# Altium PCB ANTS-MotorBoard.PcbDoc (part 2 of 3)
Units mm, origin at the board's own origin, x right, y up, seen from the top; angles counter-clockwise.
Board outline 50 x 50 mm, 2 copper layers (Top Layer, Bottom Layer); 2 components, 10 nets, 26 pads, 0 vias.
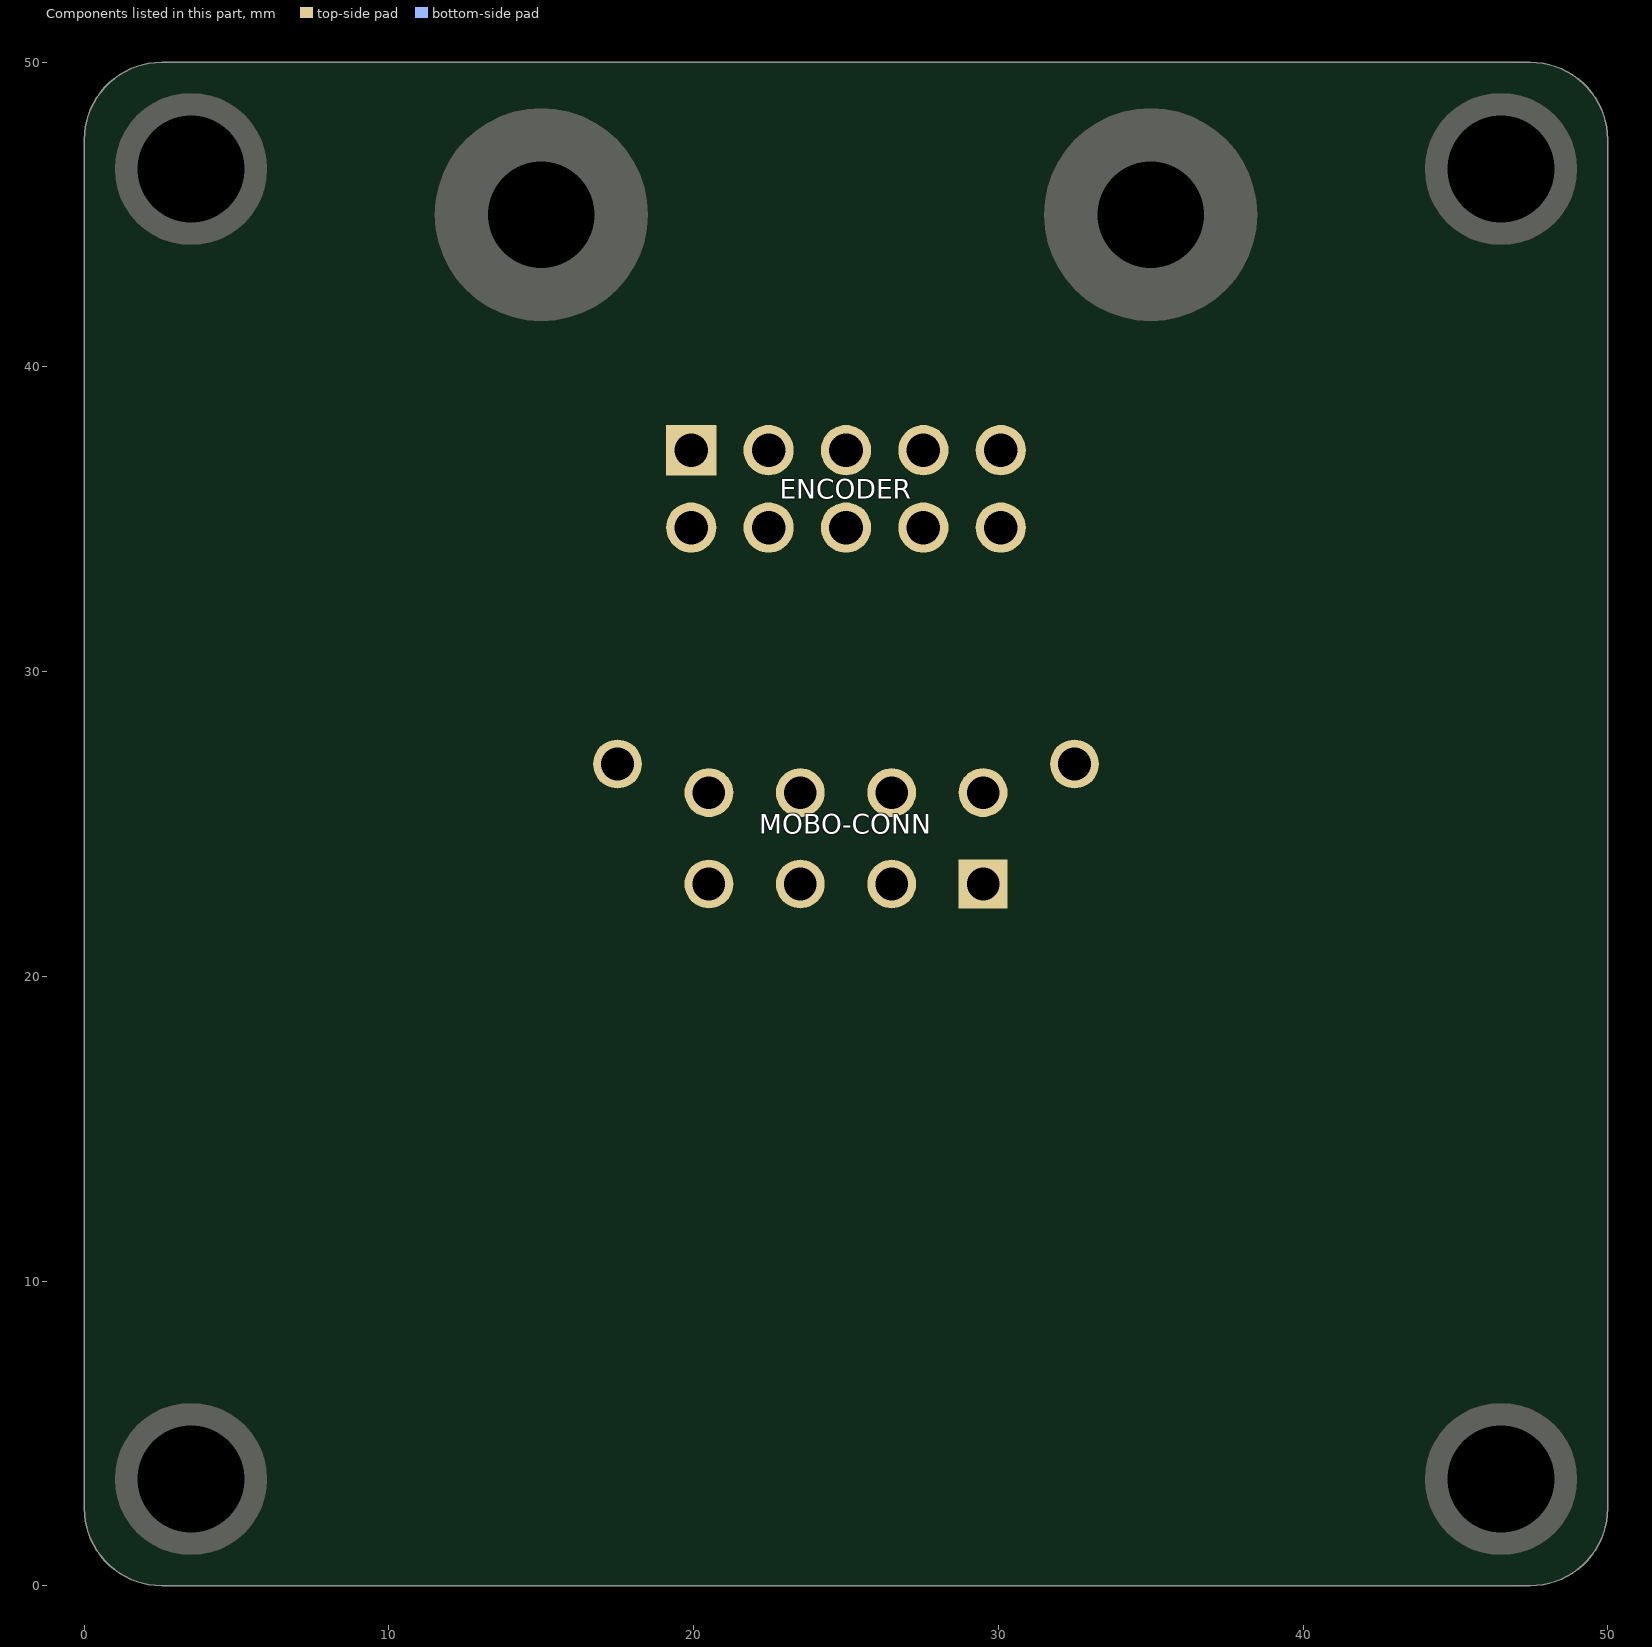
[diagram p2: the components of this part, seen from the top]

## Nets (pads, with @x,y where several pads share a name; then routed paths per layer and width w, separated by ;. In a path a pad name is that pad's centre, name@x,y a point inside that pad or via, vN(x,y) a via of type N, cw(c..) or ccw(c..) an arc to the next point about the centre after c; other vN are vias at no path point) (continued)
copper on no net: (continued)
  Top Layer w0.025: 15.7,2.159 16.005,2.159 ; 15.7,2.184 16.005,2.184 ; 15.7,2.21 15.98,2.21 ; 15.7,2.235 15.98,2.235 ; 15.7,2.261 15.954,2.261 ; 15.7,2.286 15.954,2.286 ; 15.7,2.311 15.954,2.311 ; 15.7,2.337 15.929,2.337 ; 15.7,2.362 15.929,2.362 ; 15.7,2.388 15.929,2.388 ; 15.7,2.413 15.929,2.413 ; 15.7,2.438 15.929,2.438 ; 15.7,2.464 15.929,2.464 ; 15.7,2.489 15.929,2.489 ; 15.7,2.515 15.929,2.515 ; 15.7,2.54 15.929,2.54 ; 15.7,2.565 15.929,2.565 ; 15.7,2.591 15.929,2.591 ; 15.7,2.616 15.954,2.616 ; 15.7,2.642 15.954,2.642 ; 15.7,2.667 15.954,2.667 ; 15.7,2.692 15.98,2.692 ; 15.7,2.718 15.98,2.718 ; 15.7,2.743 16.005,2.743 ; 15.726,2.108 16.081,2.108 ; 15.726,2.134 16.031,2.134 ; 15.726,2.769 16.031,2.769 ; 15.726,2.794 16.056,2.794 ; 15.726,2.819 16.081,2.819 ; 15.751,2.057 16.183,2.057 ; 15.751,2.083 16.107,2.083 ; 15.751,2.845 16.132,2.845 ; 15.777,2.032 16.589,2.032 ; 15.777,2.87 16.234,2.87 ; 15.777,2.896 17.047,2.896 ; 15.802,1.981 16.589,1.981 ; 15.802,2.007 16.589,2.007 ; 15.802,2.921 17.047,2.921 ; 15.827,1.956 16.589,1.956 ; 15.827,2.946 17.047,2.946 ; 15.853,1.93 16.589,1.93 ; 15.853,2.972 17.047,2.972 ; 15.878,2.997 17.047,2.997 ; 15.904,1.905 16.589,1.905 ; 15.904,3.023 17.047,3.023 ; 15.929,1.88 16.589,1.88 ; 15.954,3.048 17.047,3.048 ; 15.98,1.854 16.589,1.854 ; 15.98,3.073 17.047,3.073 ; 16.031,1.829 16.589,1.829 ; 16.056,3.099 17.047,3.099 ; 16.107,1.803 16.589,1.803 ; 16.132,3.124 17.047,3.124 ; 16.793,1.803 17.047,1.803 ; 16.793,1.829 17.047,1.829 ; 16.793,1.854 17.047,1.854 ; 16.793,1.88 17.047,1.88 ; 16.793,1.905 17.047,1.905 ; 16.793,1.93 17.047,1.93 ; 16.793,1.956 17.047,1.956 ; 16.793,1.981 17.047,1.981 ; 16.793,2.007 17.047,2.007 ; 16.793,2.032 17.047,2.032 ; 16.793,2.057 17.047,2.057 ; 16.793,2.083 17.047,2.083 ; 16.793,2.108 17.047,2.108 ; 16.793,2.134 17.047,2.134 ; 16.793,2.159 17.047,2.159 ; 16.793,2.184 17.047,2.184 ; 16.793,2.21 17.047,2.21 ; 16.793,2.235 17.047,2.235 ; 16.793,2.261 17.047,2.261 ; 16.793,2.286 17.047,2.286 ; 16.793,2.311 17.047,2.311 ; 16.793,2.337 17.047,2.337 ; 16.793,2.362 17.047,2.362 ; 16.793,2.388 17.047,2.388 ; 16.793,2.413 17.047,2.413 ; 16.793,2.438 17.047,2.438 ; 16.793,2.464 17.047,2.464 ; 16.793,2.489 17.047,2.489 ; 16.793,2.515 17.047,2.515 ; 16.793,2.54 17.047,2.54 ; 16.793,2.565 17.047,2.565 ; 16.793,2.591 17.047,2.591 ; 16.793,2.616 17.047,2.616 ; 16.793,2.642 17.047,2.642 ; 16.793,2.667 17.047,2.667 ; 16.793,2.692 17.047,2.692 ; 16.793,2.718 17.047,2.718 ; 16.793,2.743 17.047,2.743 ; 16.793,2.769 17.047,2.769 ; 16.793,2.794 17.047,2.794 ; 16.793,2.819 17.047,2.819 ; 16.793,2.845 17.047,2.845 ; 16.793,2.87 17.047,2.87 ; 17.224,1.803 17.504,1.803 ; 17.224,1.829 17.504,1.829 ; 17.224,1.854 17.504,1.854 ; 17.224,1.88 17.504,1.88 ; 17.224,1.905 17.504,1.905 ; 17.224,1.93 17.504,1.93 ; 17.224,1.956 17.504,1.956 ; 17.224,1.981 17.504,1.981 ; 17.224,2.007 17.504,2.007 ; 17.224,2.032 17.504,2.032 ; 17.224,2.057 17.504,2.057 ; 17.224,2.083 17.504,2.083 ; 17.224,2.108 17.504,2.108 ; 17.224,2.134 17.504,2.134 ; 17.224,2.159 17.504,2.159 ; 17.224,2.184 17.504,2.184 ; 17.224,2.21 17.504,2.21 ; 17.224,2.235 17.504,2.235 ; 17.224,2.261 17.504,2.261 ; 17.224,2.286 17.504,2.286 ; 17.224,2.311 17.504,2.311 ; 17.224,2.337 17.504,2.337 ; 17.224,2.362 17.504,2.362 ; 17.224,2.388 17.504,2.388 ; 17.224,2.413 17.504,2.413 ; 17.224,2.438 17.504,2.438 ; 17.224,2.464 17.504,2.464 ; 17.224,2.489 17.504,2.489 ; 17.224,11.405 17.275,11.405 ; 17.224,11.43 17.301,11.43 ; 17.25,2.515 17.504,2.515 ; 17.25,2.54 17.504,2.54 ; 17.25,2.565 17.504,2.565 ; 17.25,2.591 17.504,2.591 ; 17.25,2.616 17.504,2.616 ; 17.25,2.642 17.529,2.642 ; 17.25,2.667 17.529,2.667 ; 17.25,2.692 17.529,2.692 ; 17.25,11.455 17.326,11.455 ; 17.275,2.718 17.555,2.718 ; 17.275,2.743 17.58,2.743 ; 17.275,2.769 17.58,2.769 ; 17.275,11.481 17.377,11.481 ; 17.301,2.794 17.631,2.794 ; 17.301,2.819 17.656,2.819 ; 17.301,11.506 17.428,11.506 ; 17.326,2.845 17.707,2.845 ; 17.326,2.87 17.783,2.87 ; 17.326,11.532 17.453,11.532 ; 17.351,2.896 18.494,2.896 ; 17.351,2.921 18.469,2.921 ; 17.351,11.557 17.478,11.557 ; 17.377,2.946 18.469,2.946 ; 17.377,11.582 17.529,11.582 ; 17.402,2.972 18.444,2.972 ; 17.402,11.608 17.555,11.608 ; 17.428,2.997 18.418,2.997 ; 17.428,11.633 17.58,11.633 ; 17.453,11.659 17.605,11.659 ; 17.478,3.023 18.367,3.023 ; 17.478,11.684 17.631,11.684 ; 17.504,3.048 18.342,3.048 ; 17.504,11.709 17.656,11.709 ; 17.555,3.073 18.291,3.073 ; 17.555,11.735 17.707,11.735 ; 17.58,11.76 17.732,11.76 ; 17.605,3.099 18.215,3.099 ; 17.605,11.786 17.758,11.786 ; 17.631,11.811 17.783,11.811 ; 17.656,11.836 17.809,11.836 ; 17.682,11.862 17.859,11.862 ; 17.707,3.124 18.139,3.124 ; 17.707,11.887 17.885,11.887 ; 17.732,11.913 17.91,11.913 ; 17.758,11.938 17.936,11.938 ; 17.783,11.963 17.961,11.963 ; 17.809,11.989 17.986,11.989 ; 17.859,12.014 18.037,12.014 ; 17.885,12.04 18.063,12.04 ; 17.91,12.065 18.088,12.065 ; 17.936,12.09 18.113,12.09 ; 17.961,12.116 18.139,12.116 ; 17.986,12.141 18.19,12.141 ; 18.012,12.167 18.24,12.167 ; 18.037,12.192 18.266,12.192 ; 18.063,2.87 18.52,2.87 ; 18.063,12.217 18.291,12.217 ; 18.113,12.243 18.317,12.243 ; 18.139,2.845 18.52,2.845 ; 18.139,12.268 18.342,12.268 ; 18.164,12.294 18.367,12.294 ; 18.19,2.819 18.545,2.819 ; 18.19,12.319 18.418,12.319 ; 18.215,2.794 18.545,2.794 ; 18.215,12.344 18.444,12.344 ; 18.24,2.769 18.571,2.769 ; 18.24,12.37 18.469,12.37 ; 18.266,2.743 18.571,2.743 ; 18.266,12.395 18.52,12.395 ; 18.291,2.692 18.596,2.692 ; 18.291,2.718 18.571,2.718 ; 18.291,12.421 18.545,12.421 ; 18.317,2.642 18.596,2.642 ; 18.317,2.667 18.596,2.667 ; 18.317,12.446 18.571,12.446 ; 18.342,1.803 18.621,1.803 ; 18.342,1.829 18.621,1.829 ; 18.342,1.854 18.621,1.854 ; 18.342,1.88 18.621,1.88 ; 18.342,1.905 18.621,1.905 ; 18.342,1.93 18.621,1.93 ; 18.342,1.956 18.621,1.956 ; 18.342,1.981 18.621,1.981 ; 18.342,2.007 18.621,2.007 ; 18.342,2.032 18.621,2.032 ; 18.342,2.057 18.621,2.057 ; 18.342,2.083 18.621,2.083 ; 18.342,2.108 18.621,2.108 ; 18.342,2.134 18.621,2.134 ; 18.342,2.159 18.621,2.159 ; 18.342,2.184 18.621,2.184 ; 18.342,2.21 18.621,2.21 ; 18.342,2.235 18.621,2.235 ; 18.342,2.261 18.621,2.261 ; 18.342,2.286 18.621,2.286 ; 18.342,2.311 18.621,2.311 ; 18.342,2.337 18.621,2.337 ; 18.342,2.362 18.621,2.362 ; 18.342,2.388 18.621,2.388 ; 18.342,2.413 18.621,2.413 ; 18.342,2.438 18.621,2.438 ; 18.342,2.464 18.596,2.464 ; 18.342,2.489 18.596,2.489 ; 18.342,2.515 18.596,2.515 ; 18.342,2.54 18.596,2.54 ; 18.342,2.565 18.596,2.565 ; 18.342,2.591 18.596,2.591 ; 18.342,2.616 18.596,2.616 ; 18.342,12.471 18.596,12.471 ; 18.367,12.497 18.621,12.497 ; 18.393,12.522 18.647,12.522 ; 18.418,12.548 18.698,12.548 ; 18.469,12.573 18.723,12.573 ; 18.494,12.598 18.748,12.598 ; 18.52,12.624 18.774,12.624 ; 18.545,12.649 18.825,12.649 ; 18.571,12.675 18.85,12.675 ; 18.596,12.7 18.875,12.7 ; 18.647,12.725 18.901,12.725 ; 18.672,12.751 18.952,12.751 ; 18.698,12.776 18.977,12.776 ; 18.723,12.802 19.028,12.802 ; 18.748,12.827 19.053,12.827 ; 18.774,12.852 19.104,12.852 ; 18.799,2.896 20.222,2.896 ; 18.799,2.921 20.222,2.921 ; 18.799,2.946 20.222,2.946 ; 18.799,2.972 20.222,2.972 ; 18.799,2.997 20.222,2.997 ; 18.799,3.023 20.222,3.023 ; 18.799,3.048 20.222,3.048 ; 18.799,3.073 20.222,3.073 ; 18.799,3.099 20.222,3.099 ; 18.799,3.124 20.222,3.124 ; 18.799,10.719 20.704,10.719 ; 18.799,10.744 20.806,10.744 ; 18.799,10.77 20.857,10.77 ; 18.799,10.795 20.933,10.795 ; 18.799,12.878 19.129,12.878 ; 18.825,10.693 20.653,10.693 ; 18.825,10.82 21.009,10.82 ; 18.825,10.846 21.085,10.846 ; 18.825,10.871 21.161,10.871 ; 18.825,12.903 19.688,12.903 ; 18.85,10.668 20.552,10.668 ; 18.85,10.897 21.238,10.897 ; 18.85,10.922 21.314,10.922 ; 18.85,10.947 21.39,10.947 ; 18.85,10.973 21.466,10.973 ; 18.85,12.929 19.663,12.929 ; 18.875,10.643 20.501,10.643 ; 18.875,10.998 21.542,10.998 ; 18.875,11.024 21.619,11.024 ; 18.875,11.049 21.669,11.049 ; 18.875,11.074 21.746,11.074 ; 18.875,11.1 21.796,11.1 ; 18.875,12.954 19.637,12.954 ; 18.901,10.617 20.425,10.617 ; 18.901,11.125 21.898,11.125 ; 18.901,11.151 21.974,11.151 ; 18.901,11.176 22.05,11.176 ; 18.901,11.201 22.127,11.201 ; 18.901,12.979 19.587,12.979 ; 18.926,10.566 20.272,10.566 ; 18.926,10.592 20.349,10.592 ; 18.926,11.227 22.203,11.227 ; 18.926,11.252 22.254,11.252 ; 18.926,11.278 22.355,11.278 ; 18.926,11.303 22.381,11.303 ; 18.926,11.328 22.66,11.328 ; 18.926,11.354 22.685,11.354 ; 18.952,10.541 20.196,10.541 ; 18.952,11.379 22.685,11.379 ; 18.952,11.405 22.711,11.405 ; 18.952,11.43 22.711,11.43 ; 18.952,11.455 22.711,11.455 ; 18.952,11.481 22.736,11.481 ; 18.952,13.005 19.561,13.005 ; 18.977,10.516 20.145,10.516 ; 18.977,11.506 22.736,11.506 ; 18.977,11.532 22.762,11.532 ; 19.002,10.49 20.044,10.49 ; 19.002,11.557 22.762,11.557 ; 19.002,11.582 22.762,11.582 ; 19.002,11.608 22.787,11.608 ; 19.002,11.633 22.787,11.633 ; 19.002,11.659 22.787,11.659 ; 19.002,11.684 22.812,11.684 ; 19.002,11.709 22.812,11.709 ; 19.002,13.03 19.536,13.03 ; 19.028,10.439 19.917,10.439 ; 19.028,10.465 19.968,10.465 ; 19.028,11.735 22.812,11.735 ; 19.028,11.76 22.838,11.76 ; 19.028,11.786 22.838,11.786 ; 19.028,11.811 22.838,11.811 ; 19.053,10.414 19.841,10.414 ; 19.053,11.836 22.863,11.836 ; 19.053,11.862 22.889,11.862 ; 19.053,11.887 22.889,11.887 ; 19.079,10.389 19.764,10.389 ; 19.079,11.913 22.889,11.913 ; 19.079,11.938 22.889,11.938 ; 19.079,11.963 22.914,11.963 ; 19.079,11.989 22.914,11.989 ; 19.104,10.363 19.688,10.363 ; 19.104,12.014 22.939,12.014 ; 19.129,10.338 19.612,10.338 ; 19.129,12.04 22.939,12.04 ; 19.129,13.056 19.51,13.056 ; 19.155,10.312 19.536,10.312 ; 19.155,12.065 22.965,12.065 ; 19.18,10.262 19.383,10.262 ; 19.18,10.287 19.434,10.287 ; 19.206,10.236 19.307,10.236 ; 19.206,12.09 22.965,12.09 ; 19.231,12.116 22.99,12.116 ; 19.231,13.081 19.485,13.081 ; 19.256,12.878 19.714,12.878 ; 19.282,12.141 23.016,12.141 ; 19.282,12.852 19.739,12.852 ; 19.307,12.167 23.041,12.167 ; 19.307,12.827 19.79,12.827 ; 19.333,12.192 23.066,12.192 ; 19.333,12.802 19.815,12.802 ; 19.358,1.803 19.612,1.803 ; 19.358,1.829 19.612,1.829 ; 19.358,1.854 19.612,1.854 ; 19.358,1.88 19.612,1.88 ; 19.358,1.905 19.612,1.905 ; 19.358,1.93 19.612,1.93 ; 19.358,1.956 19.612,1.956 ; 19.358,1.981 19.612,1.981 ; 19.358,2.007 19.612,2.007 ; 19.358,2.032 19.612,2.032 ; 19.358,2.057 19.612,2.057 ; 19.358,2.083 19.612,2.083 ; 19.358,2.108 19.612,2.108 ; 19.358,2.134 19.612,2.134 ; 19.358,2.159 19.612,2.159 ; 19.358,2.184 19.612,2.184 ; 19.358,2.21 19.612,2.21 ; 19.358,2.235 19.612,2.235 ; 19.358,2.261 19.612,2.261 ; 19.358,2.286 19.612,2.286 ; 19.358,2.311 19.612,2.311 ; 19.358,2.337 19.612,2.337 ; 19.358,2.362 19.612,2.362 ; 19.358,2.388 19.612,2.388 ; 19.358,2.413 19.612,2.413 ; 19.358,2.438 19.612,2.438 ; 19.358,2.464 19.612,2.464 ; 19.358,2.489 19.612,2.489 ; 19.358,2.515 19.612,2.515 ; 19.358,2.54 19.612,2.54 ; 19.358,2.565 19.612,2.565 ; 19.358,2.591 19.612,2.591 ; 19.358,2.616 19.612,2.616 ; 19.358,2.642 19.612,2.642 ; 19.358,2.667 19.612,2.667 ; 19.358,2.692 19.612,2.692 ; 19.358,2.718 19.612,2.718 ; 19.358,2.743 19.612,2.743 ; 19.358,2.769 19.612,2.769 ; 19.358,2.794 19.612,2.794 ; 19.358,2.819 19.612,2.819 ; 19.358,2.845 19.612,2.845 ; 19.358,2.87 19.612,2.87 ; 19.358,12.217 23.092,12.217 ; 19.358,12.751 19.866,12.751 ; 19.358,12.776 19.841,12.776 ; 19.383,12.725 19.891,12.725 ; 19.383,13.106 19.434,13.106 ; 19.409,12.243 23.117,12.243 ; 19.409,12.7 19.942,12.7 ; 19.434,12.268 22.431,12.268 ; 19.434,12.675 19.968,12.675 ; 19.46,12.294 22.381,12.294 ; 19.46,12.649 19.993,12.649 ; 19.485,12.319 22.355,12.319 ; 19.485,12.624 20.018,12.624 ; 19.51,12.598 21.974,12.598 ; 19.536,12.344 22.33,12.344 ; 19.536,12.548 22.05,12.548 ; 19.536,12.573 22,12.573 ; 19.561,12.37 22.304,12.37 ; 19.587,12.446 22.177,12.446 ; 19.587,12.471 22.152,12.471 ; 19.587,12.522 22.076,12.522 ; 19.612,12.395 22.254,12.395 ; 19.612,12.421 22.203,12.421 ; 19.612,12.497 22.101,12.497 ; 20.069,4.775 20.12,4.775 ; 20.069,4.801 20.145,4.801 ; 20.069,4.826 20.171,4.826 ; 20.069,4.851 20.196,4.851 ; 20.095,4.877 20.222,4.877 ; 20.12,4.902 20.247,4.902 ; 20.12,4.928 20.272,4.928 ; 20.12,12.624 21.923,12.624 ; 20.145,4.953 20.298,4.953 ; 20.145,12.649 21.898,12.649 ; 20.171,4.978 20.323,4.978 ; 20.171,5.004 20.349,5.004 ; 20.196,5.029 20.374,5.029 ; 20.196,12.675 21.873,12.675 ; 20.222,5.055 20.374,5.055 ; 20.222,5.08 20.399,5.08 ; 20.247,5.105 20.425,5.105 ; 20.272,5.131 20.45,5.131 ; 20.272,5.156 20.476,5.156 ; 20.272,12.7 21.822,12.7 ; 20.298,5.182 20.501,5.182 ; 20.298,12.725 21.796,12.725 ; 20.323,5.207 20.526,5.207 ; 20.323,5.232 20.552,5.232 ; 20.349,5.258 20.577,5.258 ; 20.349,5.283 20.603,5.283 ; 20.349,12.751 21.746,12.751 ; 20.374,5.309 20.628,5.309 ; 20.399,1.803 21.39,1.803 ; 20.399,1.829 21.492,1.829 ; 20.399,1.854 21.542,1.854 ; 20.399,1.88 21.593,1.88 ; 20.399,1.905 21.619,1.905 ; 20.399,1.93 21.669,1.93 ; 20.399,1.956 21.695,1.956 ; 20.399,1.981 21.695,1.981 ; 20.399,2.007 21.72,2.007 ; 20.399,2.464 21.72,2.464 ; 20.399,2.489 21.72,2.489 ; 20.399,2.515 21.695,2.515 ; 20.399,2.54 21.669,2.54 ; 20.399,2.565 21.644,2.565 ; 20.399,2.591 21.593,2.591 ; 20.399,2.616 21.542,2.616 ; 20.399,2.642 21.492,2.642 ; 20.399,2.667 21.415,2.667 ; 20.399,2.692 21.263,2.692 ; 20.399,2.718 20.679,2.718 ; 20.399,5.334 20.653,5.334 ; 20.399,12.776 21.72,12.776 ; 20.425,2.032 21.746,2.032 ; 20.425,2.438 21.746,2.438 ; 20.425,2.743 20.679,2.743 ; 20.425,2.769 20.704,2.769 ; 20.425,2.794 20.704,2.794 ; 20.425,2.819 20.755,2.819 ; 20.425,2.845 20.806,2.845 ; 20.425,5.359 20.679,5.359 ; 20.425,5.385 20.679,5.385 ; 20.45,2.87 20.907,2.87 ; 20.45,2.896 21.771,2.896 ; 20.45,5.41 20.704,5.41 ; 20.45,5.436 20.73,5.436 ; 20.45,12.802 21.695,12.802 ; 20.476,2.921 21.771,2.921 ; 20.476,5.461 20.755,5.461 ; 20.476,5.486 20.78,5.486 ; 20.501,2.946 21.771,2.946 ; 20.501,5.512 20.806,5.512 ; 20.501,5.537 20.831,5.537 ; 20.501,12.827 21.644,12.827 ; 20.526,2.972 21.771,2.972 ; 20.526,5.563 20.857,5.563 ; 20.552,2.997 21.771,2.997 ; 20.552,5.588 20.882,5.588 ; 20.552,5.613 20.882,5.613 ; 20.552,5.639 20.882,5.639 ; 20.552,5.664 20.882,5.664 ; 20.552,5.69 20.882,5.69 ; 20.552,5.715 20.882,5.715 ; 20.552,5.74 20.907,5.74 ; 20.552,5.766 20.907,5.766 ; 20.552,5.791 20.907,5.791 ; 20.552,5.817 20.907,5.817 ; 20.552,6.274 20.933,6.274 ; 20.552,6.299 20.933,6.299 ; 20.552,6.604 20.958,6.604 ; 20.552,6.629 20.958,6.629 ; 20.552,6.655 20.958,6.655 ; 20.552,6.96 20.958,6.96 ; 20.552,6.985 20.958,6.985 ; 20.552,12.852 21.619,12.852 ; 20.577,3.023 21.771,3.023 ; 20.577,5.842 20.907,5.842 ; 20.577,5.867 20.907,5.867 ; 20.577,5.893 20.907,5.893 ; 20.577,5.918 20.907,5.918 ; 20.577,5.944 20.907,5.944 ; 20.577,5.969 20.907,5.969 ; 20.577,5.994 20.907,5.994 ; 20.577,6.02 20.907,6.02 ; 20.577,6.045 20.907,6.045 ; 20.577,6.071 20.933,6.071 ; 20.577,6.096 20.933,6.096 ; 20.577,6.121 20.933,6.121 ; 20.577,6.147 20.933,6.147 ; 20.577,6.172 20.933,6.172 ; 20.577,6.198 20.933,6.198 ; 20.577,6.223 20.933,6.223 ; 20.577,6.248 20.933,6.248 ; 20.577,6.325 20.933,6.325 ; 20.577,6.35 20.933,6.35 ; 20.577,6.375 20.933,6.375 ; 20.577,6.401 20.933,6.401 ; 20.577,6.426 20.933,6.426 ; 20.577,6.452 20.933,6.452 ; 20.577,6.477 20.958,6.477 ; 20.577,6.502 20.958,6.502 ; 20.577,6.528 20.958,6.528 ; 20.577,6.553 20.958,6.553 ; 20.577,6.579 20.958,6.579 ; 20.577,6.68 20.958,6.68 ; 20.577,6.706 20.958,6.706 ; 20.577,6.731 20.958,6.731 ; 20.577,6.756 20.958,6.756 ; 20.577,6.782 20.958,6.782 ; 20.577,6.807 20.958,6.807 ; 20.577,6.833 20.958,6.833 ; 20.577,6.858 20.958,6.858 ; 20.577,6.883 20.958,6.883 ; 20.577,6.909 20.958,6.909 ; 20.577,6.934 20.958,6.934 ; 20.577,7.01 20.958,7.01 ; 20.577,7.036 20.958,7.036 ; 20.577,7.061 20.958,7.061 ; 20.577,7.087 20.958,7.087 ; 20.577,7.112 20.958,7.112 ; 20.577,7.137 20.958,7.137 ; 20.577,7.163 20.958,7.163 ; 20.577,7.188 20.958,7.188 ; 20.577,7.214 20.958,7.214 ; 20.577,7.239 20.958,7.239 ; 20.577,7.264 20.958,7.264 ; 20.577,7.29 20.958,7.29 ; 20.577,7.315 20.958,7.315 ; 20.577,7.341 20.958,7.341 ; 20.577,7.366 20.984,7.366 ; 20.577,7.391 20.984,7.391 ; 20.577,7.417 20.984,7.417 ; 20.577,7.442 20.984,7.442 ; 20.577,7.468 20.984,7.468 ; 20.577,7.493 20.984,7.493 ; 20.577,7.518 20.984,7.518 ; 20.577,7.544 20.984,7.544 ; 20.577,7.569 20.984,7.569 ; 20.577,7.595 20.984,7.595 ; 20.577,7.62 20.984,7.62 ; 20.577,7.645 20.984,7.645 ; 20.577,7.671 20.984,7.671 ; 20.577,7.696 20.984,7.696 ; 20.577,7.722 20.984,7.722 ; 20.577,7.747 20.984,7.747 ; 20.577,7.772 21.009,7.772 ; 20.577,7.798 21.009,7.798 ; 20.577,7.823 21.009,7.823 ; 20.577,7.849 21.009,7.849 ; 20.577,7.874 21.009,7.874 ; 20.577,7.899 21.009,7.899 ; 20.577,7.925 21.009,7.925 ; 20.577,7.95 21.009,7.95 ; 20.577,7.976 21.009,7.976 ; 20.577,8.001 21.009,8.001 ; 20.577,8.026 21.009,8.026 ; 20.577,8.052 21.009,8.052 ; 20.577,8.077 21.009,8.077 ; 20.577,8.103 21.009,8.103 ; 20.577,8.128 21.009,8.128 ; 20.577,8.153 21.009,8.153 ; 20.577,8.179 21.009,8.179 ; 20.577,8.204 21.009,8.204 ; 20.577,8.23 21.009,8.23 ; 20.577,8.255 21.009,8.255 ; 20.577,8.28 21.009,8.28 ; 20.577,8.306 21.009,8.306 ; 20.577,8.331 21.009,8.331 ; 20.577,8.357 21.009,8.357 ; 20.577,8.382 21.009,8.382 ; 20.577,8.407 21.009,8.407 ; 20.577,8.433 21.009,8.433 ; 20.577,8.458 21.009,8.458 ; 20.577,8.484 21.009,8.484 ; 20.577,8.509 21.009,8.509 ; 20.577,8.534 21.034,8.534 ; 20.577,8.56 21.034,8.56 ; 20.577,8.585 21.034,8.585 ; 20.577,8.611 21.034,8.611 ; 20.577,8.636 21.034,8.636 ; 20.577,8.661 21.034,8.661 ; 20.577,8.687 21.034,8.687 ; 20.577,8.712 21.034,8.712 ; 20.577,8.738 21.06,8.738 ; 20.577,8.763 21.06,8.763 ; 20.577,8.788 21.085,8.788 ; 20.577,12.878 21.568,12.878 ; 20.603,8.814 21.136,8.814 ; 20.603,8.839 21.187,8.839 ; 20.628,3.048 21.771,3.048 ; 20.628,12.903 21.542,12.903 ; 20.653,8.865 21.212,8.865 ; 20.679,3.073 21.771,3.073 ; 20.679,8.89 21.263,8.89 ; 20.679,12.929 21.517,12.929 ; 20.704,8.915 21.314,8.915 ; 20.73,3.099 21.771,3.099 ; 20.73,8.941 21.339,8.941 ; 20.73,12.954 21.466,12.954 ; 20.755,8.966 21.39,8.966 ; 20.78,8.992 21.415,8.992 ; 20.78,12.979 21.441,12.979 ; 20.806,9.017 21.466,9.017 ; 20.831,3.124 21.771,3.124 ; 20.831,9.042 21.492,9.042 ; 20.831,13.005 21.39,13.005 ; 20.882,9.068 21.542,9.068 ; 20.882,9.093 21.593,9.093 ; 20.882,13.03 21.365,13.03 ; 20.907,13.056 21.339,13.056 ; 20.933,9.119 21.644,9.119 ; 20.958,9.144 21.669,9.144 ; 20.984,9.169 21.72,9.169 ; 20.984,13.081 21.288,13.081 ; 21.009,9.195 21.771,9.195 ; 21.009,13.106 21.263,13.106 ; 21.034,9.22 21.796,9.22 ; 21.085,9.246 21.847,9.246 ; 21.085,13.132 21.238,13.132 ; 21.111,9.271 21.873,9.271 ; 21.136,9.296 21.923,9.296 ; 21.161,9.322 21.949,9.322 ; 21.187,9.347 22,9.347 ; 21.212,9.373 22.05,9.373 ; 21.238,9.398 22.076,9.398 ; 21.263,9.423 22.127,9.423 ; 21.288,9.449 22.152,9.449 ; 21.314,9.474 22.203,9.474 ; 21.339,2.057 21.746,2.057 ; 21.339,2.413 21.746,2.413 ; 21.339,9.5 22.254,9.5 ; 21.39,9.525 22.304,9.525 ; 21.415,2.083 21.771,2.083 ; 21.415,2.388 21.771,2.388 ; 21.415,9.55 22.33,9.55 ; 21.441,9.576 22.381,9.576 ; 21.466,2.108 21.771,2.108 ; 21.466,2.362 21.771,2.362 ; 21.466,9.601 22.431,9.601 ; 21.492,2.134 21.771,2.134 ; 21.492,2.337 21.771,2.337 ; 21.492,9.627 22.457,9.627 ; 21.517,2.159 21.771,2.159 ; 21.517,2.184 21.771,2.184 ; 21.517,2.21 21.771,2.21 ; 21.517,2.235 21.771,2.235 ; 21.517,2.261 21.771,2.261 ; 21.517,2.286 21.771,2.286 ; 21.517,2.311 21.771,2.311 ; 21.517,9.652 22.508,9.652 ; 21.542,9.677 22.533,9.677 ; 21.568,9.703 22.584,9.703 ; 21.619,9.728 22.609,9.728 ; 21.644,9.754 22.66,9.754 ; 21.669,9.779 22.685,9.779 ; 21.695,9.804 22.736,9.804 ; 21.72,9.83 22.787,9.83 ; 21.746,9.855 22.812,9.855 ; 21.771,9.881 22.863,9.881 ; 21.796,9.906 22.914,9.906 ; 21.822,9.931 22.939,9.931 ; 21.847,9.957 22.99,9.957 ; 21.873,9.982 23.016,9.982 ; 21.898,10.008 23.066,10.008 ; 21.949,10.033 23.117,10.033 ; 21.974,10.058 23.143,10.058 ; 22,10.084 23.193,10.084 ; 22.025,10.109 23.244,10.109 ; 22.05,10.135 23.27,10.135 ; 22.076,10.16 23.27,10.16 ; 22.101,10.185 23.27,10.185 ; 22.127,10.211 23.295,10.211 ; 22.177,10.236 23.295,10.236 ; 22.203,10.262 23.295,10.262 ; 22.228,10.287 23.295,10.287 ; 22.254,10.312 23.295,10.312 ; 22.279,10.338 23.295,10.338 ; 22.33,10.363 23.295,10.363 ; 22.33,10.389 23.295,10.389 ; 22.381,10.414 23.295,10.414 ; 22.406,10.439 23.295,10.439 ; 22.431,10.465 23.295,10.465 ; 22.431,11.303 22.66,11.303 ; 22.457,10.49 23.295,10.49 ; 22.457,10.998 22.558,10.998 ; 22.457,11.024 22.558,11.024 ; 22.457,11.049 22.558,11.049 ; 22.457,11.074 22.584,11.074 ; 22.457,11.1 22.584,11.1 ; 22.457,11.125 22.609,11.125 ; 22.457,11.151 22.609,11.151 ; 22.457,11.176 22.609,11.176 ; 22.457,11.201 22.635,11.201 ; 22.457,11.227 22.635,11.227 ; 22.457,11.252 22.635,11.252 ; 22.457,11.278 22.66,11.278 ; 22.482,10.516 23.295,10.516 ; 22.482,10.947 22.533,10.947 ; 22.482,10.973 22.533,10.973 ; 22.508,10.541 23.32,10.541 ; 22.508,10.566 23.32,10.566 ; 22.508,10.592 23.32,10.592 ; 22.533,10.617 23.32,10.617 ; 22.533,10.643 23.32,10.643 ; 22.533,10.668 23.32,10.668 ; 22.533,12.268 23.143,12.268 ; 22.558,10.693 23.32,10.693 ; 22.584,10.719 23.32,10.719 ; 22.584,10.744 23.32,10.744 ; 22.584,10.77 23.32,10.77 ; 22.584,10.795 23.32,10.795 ; 22.584,10.82 23.32,10.82 ; 22.609,10.846 23.32,10.846 ; 22.609,10.871 23.32,10.871 ; 22.635,10.897 23.32,10.897 ; 22.635,12.294 23.168,12.294 ; 22.66,10.922 23.32,10.922 ; 22.66,10.947 23.346,10.947 ; 22.66,10.973 23.346,10.973 ; 22.66,10.998 23.346,10.998 ; 22.685,11.024 23.346,11.024 ; 22.685,11.049 23.346,11.049 ; 22.685,11.074 23.346,11.074 ; 22.711,11.1 23.346,11.1 ; 22.711,11.125 23.346,11.125 ; 22.736,11.151 23.371,11.151 ; 22.736,11.176 23.371,11.176 ; 22.736,11.201 23.371,11.201 ; 22.736,11.227 23.371,11.227 ; 22.762,11.252 23.371,11.252 ; 22.762,11.278 23.371,11.278 ; 22.787,11.303 23.371,11.303 ; 22.787,11.328 23.371,11.328 ; 22.812,11.354 23.371,11.354 ; 22.812,11.379 23.371,11.379 ; 22.812,11.405 23.397,11.405 ; 22.838,11.43 23.397,11.43 ; 22.838,11.455 23.397,11.455 ; 22.838,11.481 23.397,11.481 ; 22.838,12.319 23.193,12.319 ; 22.863,11.506 23.397,11.506 ; 22.863,11.532 23.397,11.532 ; 22.863,11.557 23.397,11.557 ; 22.889,11.582 23.397,11.582 ; 22.889,11.608 23.397,11.608 ; 22.914,11.633 23.397,11.633 ; 22.914,11.659 23.397,11.659 ; 22.914,11.684 23.397,11.684 ; 22.939,3.912 22.99,3.912 ; 22.939,3.937 22.99,3.937 ; 22.939,3.962 23.016,3.962 ; 22.939,3.988 23.016,3.988 ; 22.939,4.013 23.016,4.013 ; 22.939,4.039 23.041,4.039 ; 22.939,11.709 23.397,11.709 ; 22.939,11.735 23.397,11.735 ; 22.965,4.064 23.066,4.064 ; 22.965,4.089 23.066,4.089 ; 22.965,4.115 23.092,4.115 ; 22.965,4.14 23.092,4.14 ; 22.965,4.166 23.117,4.166 ; 22.965,11.76 23.397,11.76 ; 22.965,11.786 23.397,11.786 ; 22.965,11.811 23.397,11.811 ; 22.99,4.191 23.117,4.191 ; 22.99,4.216 23.117,4.216 ; 22.99,11.836 23.397,11.836 ; 22.99,11.862 23.422,11.862 ; 22.99,11.887 23.422,11.887 ; 22.99,12.344 23.193,12.344 ; 23.016,4.242 23.143,4.242 ; 23.016,4.267 23.143,4.267 ; 23.016,4.293 23.168,4.293 ; 23.016,4.318 23.168,4.318 ; 23.016,4.343 23.193,4.343 ; 23.016,11.913 23.422,11.913 ; 23.016,11.938 23.422,11.938 ; 23.016,11.963 23.422,11.963 ; 23.041,4.369 23.193,4.369 ; 23.041,4.394 23.219,4.394 ; 23.041,4.42 23.219,4.42 ; 23.041,4.445 23.244,4.445 ; 23.041,4.47 23.244,4.47 ; 23.041,6.833 23.447,6.833 ; 23.041,6.858 23.473,6.858 ; 23.041,6.883 23.473,6.883 ; 23.041,6.909 23.473,6.909 ; 23.041,6.934 23.473,6.934 ; 23.041,6.96 23.473,6.96 ; 23.041,6.985 23.473,6.985 ; 23.041,7.01 23.473,7.01 ; 23.041,7.036 23.473,7.036 ; 23.041,7.061 23.473,7.061 ; 23.041,7.087 23.473,7.087 ; 23.041,7.112 23.473,7.112 ; 23.041,7.137 23.473,7.137 ; 23.041,7.163 23.473,7.163 ; 23.041,7.188 23.473,7.188 ; 23.041,7.214 23.473,7.214 ; 23.041,7.239 23.473,7.239 ; 23.041,7.264 23.473,7.264 ; 23.041,7.29 23.473,7.29 ; 23.041,7.315 23.498,7.315 ; 23.041,7.341 23.498,7.341 ; 23.041,7.366 23.498,7.366 ; 23.041,7.391 23.498,7.391 ; 23.041,7.417 23.498,7.417 ; 23.041,7.442 23.498,7.442 ; 23.041,7.468 23.498,7.468 ; 23.041,7.493 23.498,7.493 ; 23.041,7.518 23.498,7.518 ; 23.041,7.544 23.498,7.544 ; 23.041,7.569 23.498,7.569 ; 23.041,7.595 23.498,7.595 ; 23.041,7.62 23.498,7.62 ; 23.041,7.645 23.498,7.645 ; 23.041,7.671 23.498,7.671 ; 23.041,7.696 23.498,7.696 ; 23.041,7.722 23.498,7.722 ; 23.041,7.747 23.498,7.747 ; 23.041,7.772 23.498,7.772 ; 23.041,7.798 23.498,7.798 ; 23.041,7.823 23.498,7.823 ; 23.041,7.849 23.498,7.849 ; 23.041,7.874 23.524,7.874 ; 23.041,7.899 23.524,7.899 ; 23.041,7.925 23.524,7.925 ; 23.041,7.95 23.524,7.95 ; 23.041,7.976 23.498,7.976 ; 23.041,8.001 23.498,8.001 ; 23.041,8.026 23.498,8.026 ; 23.041,8.052 23.524,8.052 ; 23.041,8.077 23.524,8.077 ; 23.041,8.103 23.524,8.103 ; 23.041,8.128 23.524,8.128 ; 23.041,8.153 23.524,8.153 ; 23.041,8.179 23.524,8.179 ; 23.041,8.204 23.524,8.204 ; 23.041,8.23 23.498,8.23 ; 23.041,8.255 23.498,8.255 ; 23.041,8.28 23.524,8.28 ; 23.041,8.306 23.524,8.306 ; 23.041,8.331 23.524,8.331 ; 23.041,8.357 23.549,8.357 ; 23.041,8.382 23.549,8.382 ; 23.041,8.407 23.549,8.407 ; 23.041,8.433 23.574,8.433 ; 23.041,11.989 23.422,11.989 ; 23.041,12.014 23.422,12.014 ; 23.066,4.496 23.27,4.496 ; 23.066,4.521 23.27,4.521 ; 23.066,4.547 23.295,4.547 ; 23.066,5.486 23.422,5.486 ; 23.066,5.512 23.422,5.512 ; 23.066,5.537 23.422,5.537 ; 23.066,5.563 23.422,5.563 ; 23.066,5.588 23.422,5.588 ; 23.066,5.613 23.422,5.613 ; 23.066,5.639 23.422,5.639 ; 23.066,5.664 23.422,5.664 ; 23.066,5.69 23.422,5.69 ; 23.066,5.715 23.422,5.715 ; 23.066,5.74 23.422,5.74 ; 23.066,5.766 23.422,5.766 ; 23.066,5.791 23.422,5.791 ; 23.066,5.817 23.422,5.817 ; 23.066,5.842 23.422,5.842 ; 23.066,5.867 23.422,5.867 ; 23.066,5.918 23.447,5.918 ; 23.066,5.944 23.447,5.944 ; 23.066,5.969 23.447,5.969 ; 23.066,5.994 23.447,5.994 ; 23.066,6.02 23.447,6.02 ; 23.066,6.045 23.447,6.045 ; 23.066,6.071 23.447,6.071 ; 23.066,6.096 23.447,6.096 ; 23.066,6.121 23.447,6.121 ; 23.066,6.147 23.447,6.147 ; 23.066,6.172 23.447,6.172 ; 23.066,6.198 23.447,6.198 ; 23.066,6.223 23.447,6.223 ; 23.066,6.248 23.447,6.248 ; 23.066,6.274 23.447,6.274 ; 23.066,6.299 23.447,6.299 ; 23.066,6.325 23.447,6.325 ; 23.066,6.35 23.447,6.35 ; 23.066,6.375 23.447,6.375 ; 23.066,6.401 23.447,6.401 ; 23.066,6.426 23.447,6.426 ; 23.066,6.452 23.447,6.452 ; 23.066,6.477 23.447,6.477 ; 23.066,6.502 23.447,6.502 ; 23.066,6.528 23.447,6.528 ; 23.066,6.553 23.473,6.553 ; 23.066,6.579 23.473,6.579 ; 23.066,6.604 23.447,6.604 ; 23.066,6.629 23.447,6.629 ; 23.066,6.655 23.447,6.655 ; 23.066,6.68 23.447,6.68 ; 23.066,6.706 23.447,6.706 ; 23.066,6.731 23.447,6.731 ; 23.066,6.756 23.447,6.756 ; 23.066,6.782 23.447,6.782 ; 23.066,6.807 23.447,6.807 ; 23.066,8.458 23.574,8.458 ; 23.066,8.484 23.574,8.484 ; 23.066,12.04 23.422,12.04 ; 23.092,4.572 23.32,4.572 ; 23.092,4.597 23.32,4.597 ; 23.092,4.623 23.346,4.623 ; 23.092,4.648 23.346,4.648 ; 23.092,5.385 23.397,5.385 ; 23.092,5.41 23.397,5.41 ; 23.092,5.436 23.397,5.436 ; 23.092,5.461 23.422,5.461 ; 23.092,5.893 23.447,5.893 ; 23.092,8.509 23.6,8.509 ; 23.092,8.534 23.625,8.534 ; 23.092,8.56 23.625,8.56 ; 23.092,12.065 23.422,12.065 ; 23.117,4.674 23.371,4.674 ; 23.117,4.699 23.371,4.699 ; 23.117,4.724 23.397,4.724 ; 23.117,4.75 23.397,4.75 ; 23.117,4.775 23.397,4.775 ; 23.117,4.801 23.397,4.801 ; 23.117,4.826 23.397,4.826 ; 23.117,4.851 23.397,4.851 ; 23.117,4.877 23.397,4.877 ; 23.117,4.902 23.397,4.902 ; 23.117,4.928 23.397,4.928 ; 23.117,4.953 23.397,4.953 ; 23.117,4.978 23.397,4.978 ; 23.117,5.004 23.397,5.004 ; 23.117,5.029 23.397,5.029 ; 23.117,5.055 23.397,5.055 ; 23.117,5.08 23.397,5.08 ; 23.117,5.105 23.397,5.105 ; 23.117,5.131 23.397,5.131 ; 23.117,5.156 23.397,5.156 ; 23.117,5.182 23.397,5.182 ; 23.117,5.207 23.397,5.207 ; 23.117,5.232 23.397,5.232 ; 23.117,5.258 23.397,5.258 ; 23.117,5.283 23.397,5.283 ; 23.117,5.309 23.397,5.309 ; 23.117,5.334 23.397,5.334 ; 23.117,5.359 23.397,5.359 ; 23.117,8.585 23.625,8.585 ; 23.117,8.611 23.625,8.611 ; 23.117,8.636 23.651,8.636 ; 23.117,12.09 23.422,12.09 ; 23.143,2.235 24.463,2.235 ; 23.143,2.261 24.438,2.261 ; 23.143,2.286 24.413,2.286 ; 23.143,2.311 24.413,2.311 ; 23.143,2.337 24.362,2.337 ; 23.143,2.362 24.362,2.362 ; 23.143,2.388 24.387,2.388 ; 23.143,2.413 24.413,2.413 ; 23.143,2.438 24.438,2.438 ; 23.143,2.464 24.463,2.464 ; 23.143,2.896 24.463,2.896 ; 23.143,2.921 24.438,2.921 ; 23.143,2.946 24.438,2.946 ; 23.143,2.972 24.413,2.972 ; 23.143,2.997 24.387,2.997 ; 23.143,3.023 24.336,3.023 ; 23.143,3.048 24.311,3.048 ; 23.143,3.073 24.26,3.073 ; 23.143,3.099 24.184,3.099 ; 23.143,3.124 24.082,3.124 ; 23.143,8.661 23.651,8.661 ; 23.143,8.687 23.651,8.687 ; 23.143,12.116 23.422,12.116 ; 23.168,8.712 23.676,8.712 ; 23.168,8.738 23.676,8.738 ; 23.168,8.763 23.701,8.763 ; 23.168,8.788 23.701,8.788 ; 23.168,12.141 23.447,12.141 ; 23.193,8.814 23.701,8.814 ; 23.193,8.839 23.701,8.839 ; 23.193,12.167 23.447,12.167 ; 23.219,8.865 23.727,8.865 ; 23.219,8.89 23.727,8.89 ; 23.219,8.915 23.727,8.915 ; 23.219,8.941 23.752,8.941 ; 23.219,8.966 23.752,8.966 ; 23.219,12.192 23.447,12.192 ; 23.244,8.992 23.778,8.992 ; 23.244,12.217 23.447,12.217 ; 23.27,9.017 23.778,9.017 ; 23.27,9.042 23.803,9.042 ; 23.27,9.068 23.803,9.068 ; 23.27,9.093 23.803,9.093 ; 23.27,9.119 23.828,9.119 ; 23.295,9.144 23.828,9.144 ; 23.295,9.169 23.828,9.169 ; 23.295,12.243 23.447,12.243 ; 23.295,12.268 23.447,12.268 ; 23.32,9.195 23.854,9.195 ; 23.32,9.22 23.854,9.22 ; 23.32,9.246 23.854,9.246 ; 23.32,9.271 23.879,9.271 ; 23.346,9.296 23.879,9.296 ; 23.346,9.322 23.905,9.322 ; 23.346,12.294 23.447,12.294 ; 23.346,12.319 23.447,12.319 ; 23.371,9.347 23.905,9.347 ; 23.371,9.373 23.905,9.373 ; 23.371,12.344 23.447,12.344 ; 23.397,9.398 23.93,9.398 ; 23.397,9.423 23.93,9.423 ; 23.397,9.449 23.93,9.449 ; 23.397,9.474 23.955,9.474 ; 23.422,9.5 23.955,9.5 ; 23.422,9.525 23.981,9.525 ; 23.422,10.109 23.498,10.109 ; 23.422,10.135 23.498,10.135 ; 23.422,10.16 23.524,10.16 ; 23.422,10.185 23.524,10.185 ; 23.422,10.211 23.524,10.211 ; 23.422,10.236 23.549,10.236 ; 23.422,10.262 23.549,10.262 ; 23.422,10.287 23.574,10.287 ; 23.422,10.312 23.574,10.312 ; 23.422,10.338 23.574,10.338 ; 23.422,10.363 23.574,10.363 ; 23.422,10.389 23.574,10.389 ; 23.422,10.414 23.6,10.414 ; 23.422,10.439 23.6,10.439 ; 23.447,9.55 23.981,9.55 ; 23.447,9.576 23.981,9.576 ; 23.447,9.601 23.981,9.601 ; 23.447,9.627 24.006,9.627 ; 23.447,9.652 24.006,9.652 ; 23.447,10.465 23.625,10.465 ; 23.447,10.49 23.625,10.49 ; 23.447,10.516 23.625,10.516 ; 23.447,10.541 23.651,10.541 ; 23.447,10.566 23.651,10.566 ; 23.447,10.592 23.651,10.592 ; 23.447,10.617 23.676,10.617 ; 23.447,10.643 23.676,10.643 ; 23.447,10.668 23.676,10.668 ; 23.447,10.693 23.701,10.693 ; 23.447,10.719 23.701,10.719 ; 23.447,10.744 23.701,10.744 ; 23.447,10.77 23.701,10.77 ; 23.447,10.795 23.727,10.795 ; 23.447,10.82 23.727,10.82 ; 23.447,10.846 23.752,10.846 ; 23.473,9.677 24.032,9.677 ; 23.473,9.703 24.032,9.703 ; 23.473,10.871 23.752,10.871 ; 23.473,10.897 23.752,10.897 ; 23.473,10.922 23.778,10.922 ; 23.473,10.947 23.778,10.947 ; 23.473,10.973 23.778,10.973 ; 23.473,10.998 23.803,10.998 ; 23.473,11.024 23.803,11.024 ; 23.498,9.728 24.032,9.728 ; 23.498,9.754 24.057,9.754 ; 23.498,11.049 23.803,11.049 ; 23.498,11.074 23.828,11.074 ; 23.498,11.1 23.828,11.1 ; 23.498,11.125 23.828,11.125 ; 23.498,11.151 23.854,11.151 ; 23.498,11.176 23.854,11.176 ; 23.498,11.201 23.854,11.201 ; 23.498,11.227 23.879,11.227 ; 23.498,11.252 23.879,11.252 ; 23.498,11.278 23.879,11.278 ; 23.498,11.303 23.879,11.303 ; 23.498,11.328 23.905,11.328 ; 23.498,11.354 23.905,11.354 ; 23.498,11.379 23.93,11.379 ; 23.498,11.405 23.93,11.405 ; 23.498,11.43 23.93,11.43 ; 23.498,11.455 23.955,11.455 ; 23.498,11.481 23.955,11.481 ; 23.498,11.506 23.955,11.506 ; 23.498,11.532 23.981,11.532 ; 23.498,11.557 23.981,11.557 ; 23.498,11.582 23.981,11.582 ; 23.498,11.608 24.006,11.608 ; 23.524,9.779 24.057,9.779 ; 23.524,9.804 24.057,9.804 ; 23.524,9.83 24.057,9.83 ; 23.524,9.855 24.082,9.855 ; 23.524,9.881 24.108,9.881 ; 23.524,11.633 24.006,11.633 ; 23.524,11.659 24.006,11.659 ; 23.524,11.684 24.006,11.684 ; 23.524,11.709 24.032,11.709 ; 23.524,11.735 24.032,11.735 ; 23.524,11.76 24.057,11.76 ; 23.524,11.786 24.057,11.786 ; 23.524,11.811 24.057,11.811 ; 23.549,9.906 24.108,9.906 ; 23.549,9.931 24.108,9.931 ; 23.549,11.836 24.057,11.836 ; 23.549,11.862 24.082,11.862 ; 23.549,11.887 24.082,11.887 ; 23.549,11.913 24.108,11.913 ; 23.549,11.938 24.108,11.938 ; 23.549,11.963 24.133,11.963 ; 23.549,11.989 24.133,11.989 ; 23.549,12.014 24.133,12.014 ; 23.549,12.04 24.184,12.04 ; 23.549,12.065 24.209,12.065 ; 23.549,12.09 24.235,12.09 ; 23.549,12.116 24.26,12.116 ; 23.549,12.141 24.286,12.141 ; 23.549,12.167 24.336,12.167 ; 23.549,12.192 24.362,12.192 ; 23.549,12.217 24.387,12.217 ; 23.549,12.243 24.413,12.243 ; 23.549,12.268 24.438,12.268 ; 23.549,12.344 24.54,12.344 ; 23.549,12.37 24.565,12.37 ; 23.549,12.395 24.59,12.395 ; 23.574,9.957 24.133,9.957 ; 23.574,9.982 24.133,9.982 ; 23.574,10.008 24.133,10.008 ; 23.574,12.294 24.463,12.294 ; 23.574,12.319 24.489,12.319 ; 23.574,12.421 24.616,12.421 ; 23.6,10.033 24.133,10.033 ; 23.6,10.058 24.159,10.058 ; 23.6,10.084 24.159,10.084 ; 23.625,10.109 24.159,10.109 ; 23.625,10.135 24.184,10.135 ; 23.625,10.16 24.184,10.16 ; 23.625,12.446 24.641,12.446 ; 23.651,10.185 24.209,10.185 ; 23.651,10.211 24.209,10.211 ; 23.651,10.236 24.235,10.236 ; 23.651,10.262 24.235,10.262 ; 23.676,10.287 24.235,10.287 ; 23.676,10.312 24.26,10.312 ; 23.701,10.338 24.26,10.338 ; 23.701,10.363 24.286,10.363 ; 23.701,10.389 24.286,10.389 ; 23.701,10.414 24.286,10.414 ; 23.727,10.439 24.311,10.439 ; 23.727,10.465 24.311,10.465 ; 23.727,10.49 24.311,10.49 ; 23.727,12.471 24.692,12.471 ; 23.752,10.516 24.311,10.516 ; 23.752,10.541 24.336,10.541 ; 23.778,10.566 24.336,10.566 ; 23.778,10.592 24.336,10.592 ; 23.778,10.617 24.362,10.617 ; 23.778,10.643 24.362,10.643 ; 23.803,10.668 24.387,10.668 ; 23.803,10.693 24.387,10.693 ; 23.828,10.719 24.413,10.719 ; 23.828,10.744 24.413,10.744 ; 23.828,10.77 24.413,10.77 ; 23.828,10.795 24.413,10.795 ; 23.854,10.82 24.438,10.82 ; 23.854,10.846 24.438,10.846 ; 23.879,10.871 24.463,10.871 ; 23.879,10.897 24.463,10.897 ; 23.879,10.922 24.463,10.922 ; 23.905,10.947 24.463,10.947 ; 23.905,10.973 24.489,10.973 ; 23.905,10.998 24.489,10.998 ; 23.905,11.024 24.489,11.024 ; 23.93,11.049 24.514,11.049 ; 23.93,11.074 24.54,11.074 ; 23.93,11.1 24.54,11.1 ; 23.93,12.497 24.717,12.497 ; 23.955,2.489 24.463,2.489 ; 23.955,11.125 24.54,11.125 ; 23.955,11.151 24.565,11.151 ; 23.981,2.21 24.463,2.21 ; 23.981,11.176 24.565,11.176 ; 23.981,11.201 24.565,11.201 ; 23.981,11.227 24.59,11.227 ; 24.006,2.87 24.489,2.87 ; 24.006,11.252 24.59,11.252 ; 24.006,11.278 24.59,11.278 ; 24.006,11.303 24.616,11.303 ; 24.006,11.328 24.616,11.328 ; 24.032,11.354 24.616,11.354 ; 24.032,11.379 24.641,11.379 ; 24.057,11.405 24.641,11.405 ; 24.057,11.43 24.641,11.43 ; 24.057,11.455 24.667,11.455 ; 24.082,11.481 24.667,11.481 ; 24.082,11.506 24.692,11.506 ; 24.082,11.532 24.692,11.532 ; 24.082,12.522 24.743,12.522 ; 24.108,2.184 24.489,2.184 ; 24.108,2.515 24.489,2.515 ; 24.108,2.845 24.489,2.845 ; 24.108,11.557 24.717,11.557 ; 24.108,11.582 24.717,11.582 ; 24.108,11.608 24.717,11.608 ; 24.133,11.633 24.743,11.633 ; 24.133,11.659 24.743,11.659 ; 24.133,11.684 24.743,11.684 ; 24.159,2.159 24.489,2.159 ; 24.159,2.54 24.489,2.54 ; 24.159,2.819 24.489,2.819 ; 24.159,11.709 24.743,11.709 ; 24.159,11.735 24.768,11.735 ; 24.184,11.76 24.768,11.76 ; 24.184,11.786 24.768,11.786 ; 24.184,11.811 24.794,11.811 ; 24.184,11.836 24.794,11.836 ; 24.209,2.134 24.489,2.134 ; 24.209,2.565 24.489,2.565 ; 24.209,2.794 24.514,2.794 ; 24.209,11.862 24.819,11.862 ; 24.209,11.887 24.819,11.887 ; 24.209,11.913 24.844,11.913 ; 24.235,2.083 24.514,2.083 ; 24.235,2.108 24.514,2.108 ; 24.235,2.591 24.514,2.591 ; 24.235,2.616 24.514,2.616 ; 24.235,2.743 24.514,2.743 ; 24.235,2.769 24.514,2.769 ; 24.235,11.938 24.844,11.938 ; 24.235,12.548 24.794,12.548 ; 24.26,1.803 24.514,1.803 ; 24.26,1.829 24.514,1.829 ; 24.26,1.854 24.514,1.854 ; 24.26,1.88 24.514,1.88 ; 24.26,1.905 24.514,1.905 ; 24.26,1.93 24.514,1.93 ; 24.26,1.956 24.514,1.956 ; 24.26,1.981 24.514,1.981 ; 24.26,2.007 24.514,2.007 ; 24.26,2.032 24.514,2.032 ; 24.26,2.057 24.514,2.057 ; 24.26,2.642 24.514,2.642 ; 24.26,2.667 24.514,2.667 ; 24.26,2.692 24.514,2.692 ; 24.26,2.718 24.514,2.718 ; 24.26,11.963 24.844,11.963 ; 24.286,10.033 24.387,10.033 ; 24.286,10.058 26.927,10.058 ; 24.286,10.084 26.953,10.084 ; 24.286,11.989 24.87,11.989 ; 24.311,10.109 27.003,10.109 ; 24.311,10.135 27.029,10.135 ; 24.311,10.16 27.08,10.16 ; 24.311,12.014 24.87,12.014 ; 24.336,10.185 27.13,10.185 ; 24.336,10.211 27.156,10.211 ; 24.362,10.236 27.207,10.236 ; 24.362,10.262 27.232,10.262 ; 24.362,10.287 27.283,10.287 ; 24.362,12.04 24.87,12.04 ; 24.387,10.312 27.308,10.312 ; 24.387,10.338 27.359,10.338 ; 24.387,10.363 27.41,10.363 ; 24.387,12.065 24.895,12.065 ; 24.387,12.573 24.794,12.573 ; 24.413,10.389 27.435,10.389 ; 24.413,10.414 27.486,10.414 ; 24.413,12.09 24.895,12.09 ; 24.438,10.439 27.537,10.439 ; 24.438,10.465 27.562,10.465 ; 24.438,10.49 27.613,10.49 ; 24.438,10.516 27.664,10.516 ; 24.438,12.116 24.895,12.116 ; 24.463,10.033 26.876,10.033 ; 24.463,10.541 27.689,10.541 ; 24.463,10.566 27.74,10.566 ; 24.463,12.141 24.921,12.141 ; 24.489,10.592 27.765,10.592 ; 24.489,10.617 27.816,10.617 ; 24.489,10.643 27.842,10.643 ; 24.489,12.167 24.921,12.167 ; 24.489,12.598 24.819,12.598 ; 24.514,10.668 28.375,10.668 ; 24.514,10.693 28.375,10.693 ; 24.514,10.719 28.375,10.719 ; 24.54,10.744 28.35,10.744 ; 24.54,10.77 28.35,10.77 ; 24.54,12.192 24.921,12.192 ; 24.54,12.217 24.946,12.217 ; 24.565,10.795 28.324,10.795 ; 24.565,10.82 28.35,10.82 ; 24.565,10.846 28.35,10.846 ; 24.565,10.871 28.324,10.871 ; 24.565,12.243 24.946,12.243 ; 24.59,10.897 28.324,10.897 ; 24.59,10.922 28.324,10.922 ; 24.616,10.947 28.299,10.947 ; 24.616,10.973 28.299,10.973 ; 24.616,10.998 28.299,10.998 ; 24.616,12.268 24.946,12.268 ; 24.641,11.024 28.273,11.024 ; 24.641,11.049 28.273,11.049 ; 24.641,11.074 28.273,11.074 ; 24.641,12.294 24.971,12.294 ; 24.667,11.1 28.273,11.1 ; 24.667,11.125 28.273,11.125 ; 24.667,12.319 24.971,12.319 ; 24.692,11.151 28.273,11.151 ; 24.692,11.176 28.248,11.176 ; 24.692,11.201 28.248,11.201 ; 24.692,11.227 28.248,11.227 ; 24.692,12.344 24.971,12.344 ; 24.692,12.624 24.819,12.624 ; 24.717,2.235 24.997,2.235 ; 24.717,2.261 24.997,2.261 ; 24.717,2.286 24.997,2.286 ; 24.717,2.311 24.971,2.311 ; 24.717,2.337 24.971,2.337 ; 24.717,2.362 24.971,2.362 ; 24.717,2.388 24.971,2.388 ; 24.717,2.413 24.971,2.413 ; 24.717,2.438 24.971,2.438 ; 24.717,2.464 24.971,2.464 ; 24.717,2.489 24.971,2.489 ; 24.717,2.515 24.971,2.515 ; 24.717,2.54 24.971,2.54 ; 24.717,2.565 24.971,2.565 ; 24.717,2.591 24.971,2.591 ; 24.717,2.616 24.971,2.616 ; 24.717,2.642 24.997,2.642 ; 24.717,2.667 24.997,2.667 ; 24.717,2.692 24.997,2.692 ; 24.717,11.252 28.223,11.252 ; 24.743,2.134 25.073,2.134 ; 24.743,2.159 25.048,2.159 ; 24.743,2.184 25.022,2.184 ; 24.743,2.21 25.022,2.21 ; 24.743,2.718 25.022,2.718 ; 24.743,2.743 25.048,2.743 ; 24.743,2.769 25.048,2.769 ; 24.743,11.278 28.223,11.278 ; 24.743,11.303 28.223,11.303 ; 24.743,11.328 28.223,11.328 ; 24.743,11.354 28.223,11.354 ; 24.743,11.379 28.223,11.379 ; 24.743,12.37 24.997,12.37 ; 24.768,2.083 25.149,2.083 ; 24.768,2.108 25.098,2.108 ; 24.768,2.794 25.098,2.794 ; 24.768,2.819 25.124,2.819 ; 24.768,11.405 28.197,11.405 ; 24.768,12.395 25.022,12.395 ; 24.794,2.057 25.225,2.057 ; 24.794,2.845 25.175,2.845 ; 24.794,2.87 25.251,2.87 ; 24.794,11.43 28.197,11.43 ; 24.794,11.455 28.172,11.455 ; 24.794,11.481 28.172,11.481 ; 24.794,12.421 25.022,12.421 ; 24.819,2.007 25.962,2.007 ; 24.819,2.032 25.962,2.032 ; 24.819,2.896 25.962,2.896 ; 24.819,11.506 28.172,11.506 ; 24.819,11.532 28.146,11.532 ; 24.819,11.557 28.146,11.557 ; 24.819,12.446 25.022,12.446 ; 24.844,1.981 25.937,1.981 ; 24.844,2.921 25.937,2.921 ; 24.844,2.946 25.937,2.946 ; 24.844,11.582 28.146,11.582 ; 24.844,11.608 28.146,11.608 ; 24.87,1.956 25.911,1.956 ; 24.87,2.972 25.911,2.972 ; 24.87,11.633 28.146,11.633 ; 24.87,11.659 28.121,11.659 ; 24.87,11.684 28.121,11.684 ; 24.87,11.709 28.121,11.709 ; 24.87,11.735 28.121,11.735 ; 24.87,12.471 25.048,12.471 ; 24.895,1.93 25.886,1.93 ; 24.895,2.997 25.886,2.997 ; 24.895,11.76 28.096,11.76 ; 24.895,12.497 25.048,12.497 ; 24.921,1.905 25.86,1.905 ; 24.921,11.786 28.096,11.786 ; 24.921,11.811 28.096,11.811 ; 24.921,11.836 28.096,11.836 ; 24.921,11.862 28.096,11.862 ; 24.921,12.522 25.048,12.522 ; 24.946,3.023 25.835,3.023 ; 24.946,11.887 28.096,11.887 ; 24.946,11.913 28.07,11.913 ; 24.946,12.548 25.048,12.548 ; 24.971,1.88 25.81,1.88 ; 24.971,3.048 25.81,3.048 ; 24.971,11.938 28.07,11.938 ; 24.971,11.963 28.07,11.963 ; 24.971,12.573 25.048,12.573 ; 24.997,1.854 25.784,1.854 ; 24.997,10.008 26.826,10.008 ; 24.997,11.989 28.045,11.989 ; 24.997,12.014 28.045,12.014 ; 24.997,12.04 28.045,12.04 ; 24.997,12.065 28.019,12.065 ; 24.997,12.598 25.048,12.598 ; 25.022,3.073 25.759,3.073 ; 25.022,12.09 28.019,12.09 ; 25.022,12.116 28.019,12.116 ; 25.048,1.829 25.733,1.829 ; 25.048,12.141 28.019,12.141 ; 25.048,12.167 28.019,12.167 ; 25.048,12.192 26.495,12.192 ; 25.073,12.217 26.445,12.217 ; 25.073,12.243 26.394,12.243 ; 25.073,12.268 26.318,12.268 ; 25.098,3.099 25.683,3.099 ; 25.098,12.294 26.216,12.294 ; 25.098,12.319 26.191,12.319 ; 25.124,1.803 25.657,1.803 ; 25.124,12.344 26.089,12.344 ; 25.124,12.37 26.038,12.37 ; 25.124,12.395 25.962,12.395 ; 25.124,12.421 25.886,12.421 ; 25.149,12.446 25.81,12.446 ; 25.175,3.124 25.606,3.124 ; 25.175,12.471 25.759,12.471 ; 25.175,12.497 25.683,12.497 ; 25.175,12.522 25.606,12.522 ; 25.175,12.548 25.556,12.548 ; 25.2,12.573 25.454,12.573 ; 25.225,12.598 25.403,12.598 ; 25.225,12.624 25.302,12.624 ; 25.225,12.649 25.276,12.649 ; 25.251,9.982 26.775,9.982 ; 25.53,2.87 25.987,2.87 ; 25.556,2.057 25.987,2.057 ; 25.606,2.845 25.987,2.845 ; 25.632,2.083 26.013,2.083 ; 25.657,2.819 26.013,2.819 ; 25.683,2.108 26.013,2.108 ; 25.683,2.794 26.013,2.794 ; 25.708,2.134 26.013,2.134 ; 25.708,2.769 26.038,2.769 ; 25.733,2.159 26.038,2.159 ; 25.733,2.743 26.038,2.743 ; 25.733,9.957 26.749,9.957 ; 25.759,2.184 26.038,2.184 ; 25.759,2.21 26.038,2.21 ; 25.759,2.718 26.038,2.718 ; 25.784,2.235 26.064,2.235 ; 25.784,2.261 26.064,2.261 ; 25.784,2.286 26.064,2.286 ; 25.784,2.642 26.064,2.642 ; 25.784,2.667 26.064,2.667 ; 25.784,2.692 26.064,2.692 ; 25.81,2.311 26.064,2.311 ; 25.81,2.337 26.064,2.337 ; 25.81,2.362 26.064,2.362 ; 25.81,2.388 26.064,2.388 ; 25.81,2.413 26.064,2.413 ; 25.81,2.438 26.064,2.438 ; 25.81,2.464 26.064,2.464 ; 25.81,2.489 26.064,2.489 ; 25.81,2.515 26.064,2.515 ; 25.81,2.54 26.064,2.54 ; 25.81,2.565 26.064,2.565 ; 25.81,2.591 26.064,2.591 ; 25.81,2.616 26.064,2.616 ; 25.886,9.931 25.937,9.931 ; 26.013,9.931 26.064,9.931 ; 26.114,9.931 26.724,9.931 ; 26.267,1.803 27.257,1.803 ; 26.267,1.829 27.334,1.829 ; 26.267,1.854 27.41,1.854 ; 26.267,1.88 27.461,1.88 ; 26.267,1.905 27.486,1.905 ; 26.267,1.93 27.511,1.93 ; 26.267,1.956 27.537,1.956 ; 26.267,1.981 27.562,1.981 ; 26.267,2.007 27.588,2.007 ; 26.267,2.032 27.588,2.032 ; 26.267,2.057 26.521,2.057 ; 26.267,2.083 26.521,2.083 ; 26.267,2.108 26.521,2.108 ; 26.267,2.134 26.521,2.134 ; 26.267,2.159 26.521,2.159 ; 26.267,2.184 26.521,2.184 ; 26.267,2.21 26.521,2.21 ; 26.267,2.235 26.521,2.235 ; 26.267,2.261 26.521,2.261 ; 26.267,2.286 26.521,2.286 ; 26.267,2.311 26.521,2.311 ; 26.267,2.337 26.521,2.337 ; 26.267,2.362 26.521,2.362 ; 26.267,2.388 26.521,2.388 ; 26.267,2.413 26.521,2.413 ; 26.267,2.438 26.521,2.438 ; 26.267,2.464 26.521,2.464 ; 26.267,2.489 26.521,2.489 ; 26.267,2.515 26.521,2.515 ; 26.267,2.54 26.521,2.54 ; 26.267,2.565 26.521,2.565 ; 26.267,2.591 26.521,2.591 ; 26.267,2.616 26.521,2.616 ; 26.267,2.642 26.521,2.642 ; 26.267,2.667 26.521,2.667 ; 26.267,2.692 26.521,2.692 ; 26.267,2.718 26.521,2.718 ; 26.267,2.743 26.546,2.743 ; 26.267,2.769 26.546,2.769 ; 26.292,2.794 26.572,2.794 ; 26.292,2.819 26.622,2.819 ; 26.292,2.845 26.673,2.845 ; 26.292,2.87 26.775,2.87 ; 26.318,2.896 27.41,2.896 ; 26.343,2.921 27.41,2.921 ; 26.343,2.946 27.41,2.946 ; 26.343,9.906 26.648,9.906 ; 26.368,2.972 27.41,2.972 ; 26.394,2.997 27.41,2.997 ; 26.445,3.023 27.41,3.023 ; 26.47,3.048 27.41,3.048 ; 26.521,3.073 27.41,3.073 ; 26.546,12.192 27.994,12.192 ; 26.597,3.099 27.41,3.099 ; 26.597,12.217 27.994,12.217 ; 26.648,12.243 27.994,12.243 ; 26.699,3.124 27.41,3.124 ; 26.724,2.438 27.588,2.438 ; 26.724,2.464 27.588,2.464 ; 26.724,2.489 27.562,2.489 ; 26.724,2.515 27.537,2.515 ; 26.724,2.54 27.511,2.54 ; 26.724,2.565 27.486,2.565 ; 26.724,2.591 27.461,2.591 ; 26.724,2.616 27.41,2.616 ; 26.724,2.642 27.359,2.642 ; 26.724,2.667 27.257,2.667 ; 26.724,2.692 27.105,2.692 ; 26.724,12.268 27.969,12.268 ; 26.8,12.294 27.969,12.294 ; 26.851,12.319 27.969,12.319 ; 26.927,12.344 27.969,12.344 ; 26.978,12.37 27.969,12.37 ; 27.054,12.395 27.943,12.395 ; 27.13,12.421 27.943,12.421 ; 27.181,2.057 27.613,2.057 ; 27.181,12.446 27.943,12.446 ; 27.207,2.413 27.613,2.413 ; 27.257,2.083 27.613,2.083 ; 27.283,2.388 27.613,2.388 ; 27.283,12.471 27.943,12.471 ; 27.308,2.108 27.613,2.108 ; 27.308,2.362 27.613,2.362 ; 27.334,2.134 27.638,2.134 ; 27.334,12.497 27.918,12.497 ; 27.359,2.159 27.638,2.159 ; 27.359,2.311 27.638,2.311 ; 27.359,2.337 27.638,2.337 ; 27.384,2.184 27.638,2.184 ; 27.384,2.21 27.638,2.21 ; 27.384,2.235 27.638,2.235 ; 27.384,2.261 27.638,2.261 ; 27.384,2.286 27.638,2.286 ; 27.41,12.522 27.918,12.522 ; 27.461,12.548 27.892,12.548 ; 27.537,12.573 27.892,12.573 ; 27.613,12.598 27.892,12.598 ; 27.689,8.788 28.807,8.788 ; 27.689,8.814 28.807,8.814 ; 27.689,8.839 28.807,8.839 ; 27.689,8.865 28.807,8.865 ; 27.689,8.89 28.781,8.89 ; 27.689,8.915 28.781,8.915 ; 27.689,12.624 27.892,12.624 ; 27.715,8.763 28.807,8.763 ; 27.715,8.941 28.781,8.941 ; 27.715,8.966 28.781,8.966 ; 27.715,8.992 28.781,8.992 ; 27.715,9.017 28.781,9.017 ; 27.715,9.042 28.756,9.042 ; 27.715,9.068 28.756,9.068 ; 27.715,9.093 28.756,9.093 ; 27.74,8.687 28.832,8.687 ; 27.74,8.712 28.807,8.712 ; 27.74,8.738 28.807,8.738 ; 27.74,9.119 28.756,9.119 ; 27.74,9.144 28.756,9.144 ; 27.74,9.169 28.756,9.169 ; 27.74,9.195 28.731,9.195 ; 27.74,9.22 28.731,9.22 ; 27.74,9.246 28.731,9.246 ; 27.765,9.271 28.705,9.271 ; 27.765,9.296 28.705,9.296 ; 27.765,9.322 28.705,9.322 ; 27.765,9.347 28.705,9.347 ; 27.765,9.373 28.705,9.373 ; 27.765,9.398 28.68,9.398 ; 27.765,9.423 28.68,9.423 ; 27.765,9.449 28.68,9.449 ; 27.765,12.649 27.892,12.649 ; 27.791,8.636 28.832,8.636 ; 27.791,8.661 28.832,8.661 ; 27.791,9.474 28.654,9.474 ; 27.791,9.5 28.654,9.5 ; 27.791,9.525 28.654,9.525 ; 27.791,9.55 28.629,9.55 ; 27.791,9.576 28.629,9.576 ; 27.791,9.601 28.629,9.601 ; 27.791,9.627 28.629,9.627 ; 27.791,9.652 28.629,9.652 ; 27.816,8.611 28.832,8.611 ; 27.816,9.677 28.629,9.677 ; 27.816,9.703 28.604,9.703 ; 27.816,9.728 28.604,9.728 ; 27.816,9.754 28.604,9.754 ; 27.816,9.779 28.578,9.779 ; 27.816,9.804 28.578,9.804 ; 27.842,2.235 28.121,2.235 ; 27.842,2.261 28.121,2.261 ; 27.842,2.286 28.121,2.286 ; 27.842,2.311 28.096,2.311 ; 27.842,2.337 28.096,2.337 ; 27.842,2.362 28.096,2.362 ; 27.842,2.388 28.096,2.388 ; 27.842,2.413 28.096,2.413 ; 27.842,2.438 28.096,2.438 ; 27.842,2.464 28.096,2.464 ; 27.842,2.489 28.096,2.489 ; 27.842,2.515 28.096,2.515 ; 27.842,2.54 28.096,2.54 ; 27.842,2.565 28.096,2.565 ; 27.842,2.591 28.096,2.591 ; 27.842,2.616 28.121,2.616 ; 27.842,2.642 28.121,2.642 ; 27.842,2.667 28.121,2.667 ; 27.842,8.585 28.832,8.585 ; 27.842,9.83 28.578,9.83 ; 27.842,9.855 28.578,9.855 ; 27.842,9.881 28.578,9.881 ; 27.842,9.906 28.553,9.906 ; 27.842,9.931 28.553,9.931 ; 27.842,9.957 28.553,9.957 ; 27.867,2.159 28.172,2.159 ; 27.867,2.184 28.172,2.184 ; 27.867,2.21 28.146,2.21 ; 27.867,2.692 28.146,2.692 ; 27.867,2.718 28.146,2.718 ; 27.867,2.743 28.172,2.743 ; 27.867,2.769 28.197,2.769 ; 27.867,8.534 28.832,8.534 ; 27.867,8.56 28.832,8.56 ; 27.867,9.982 28.527,9.982 ; 27.867,10.008 28.527,10.008 ; 27.867,10.033 28.527,10.033 ; 27.867,10.058 28.527,10.058 ; 27.867,10.084 28.502,10.084 ; 27.892,2.108 28.248,2.108 ; 27.892,2.134 28.197,2.134